# EAGLE board IOBoard (EAGLE 9.6.2)
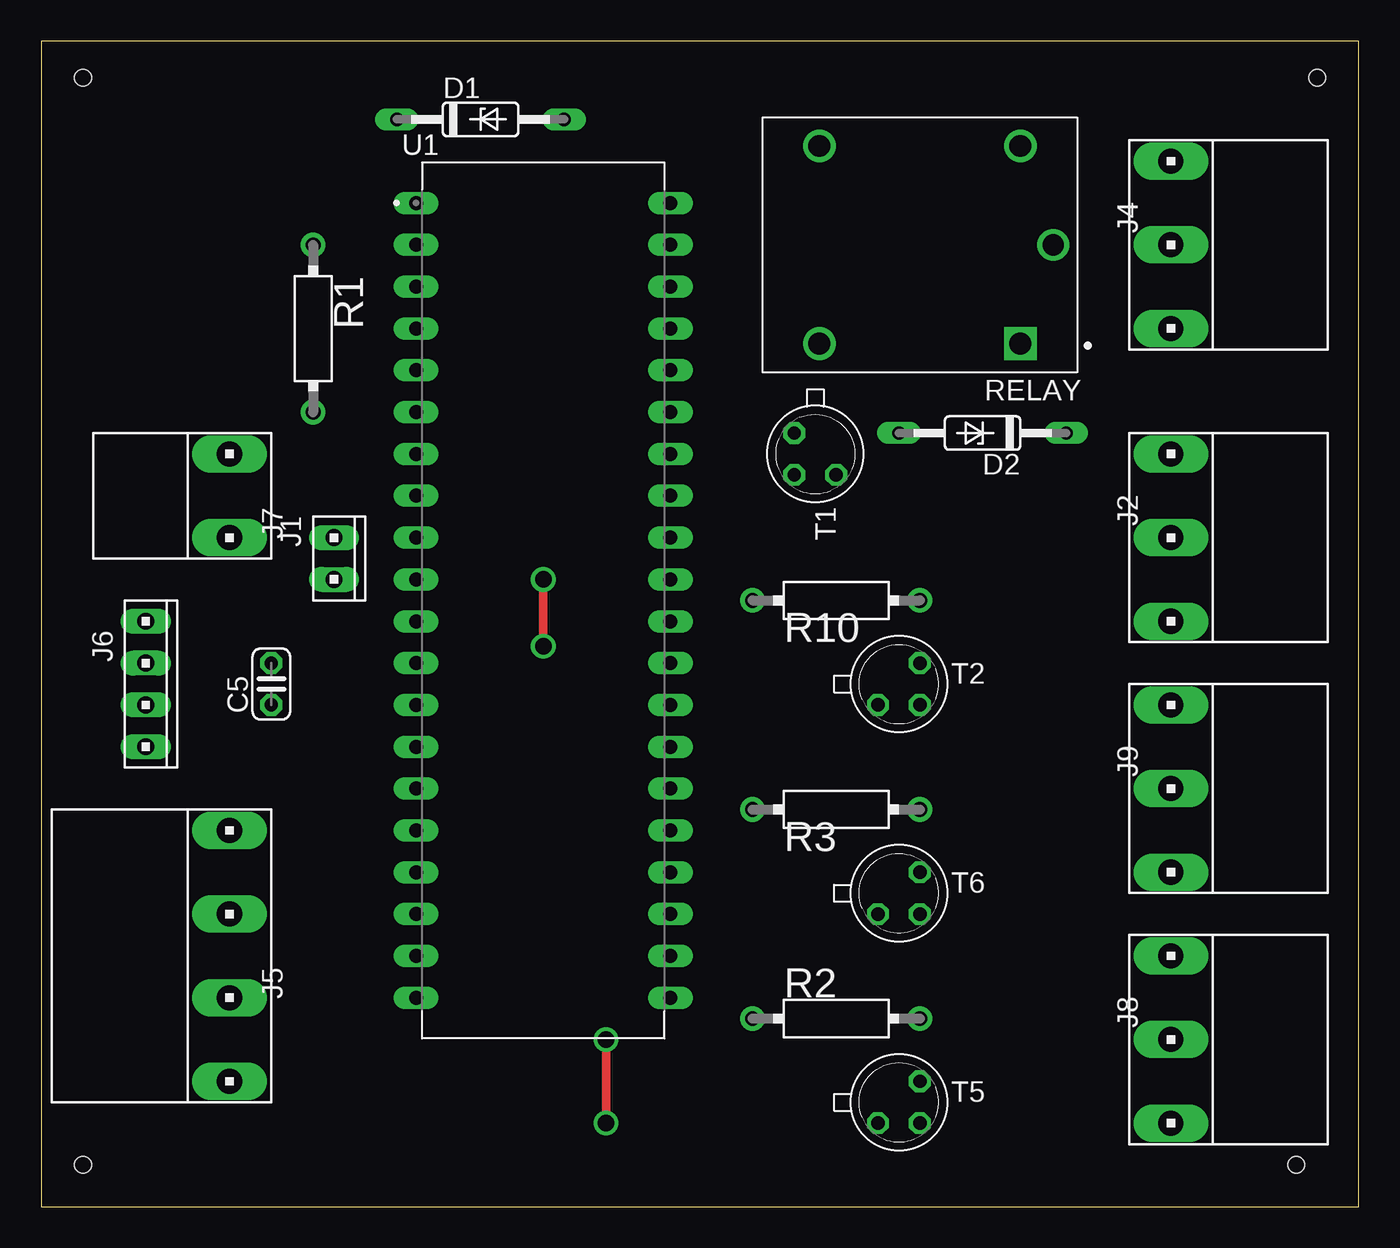
[diagram p0: board, top side]
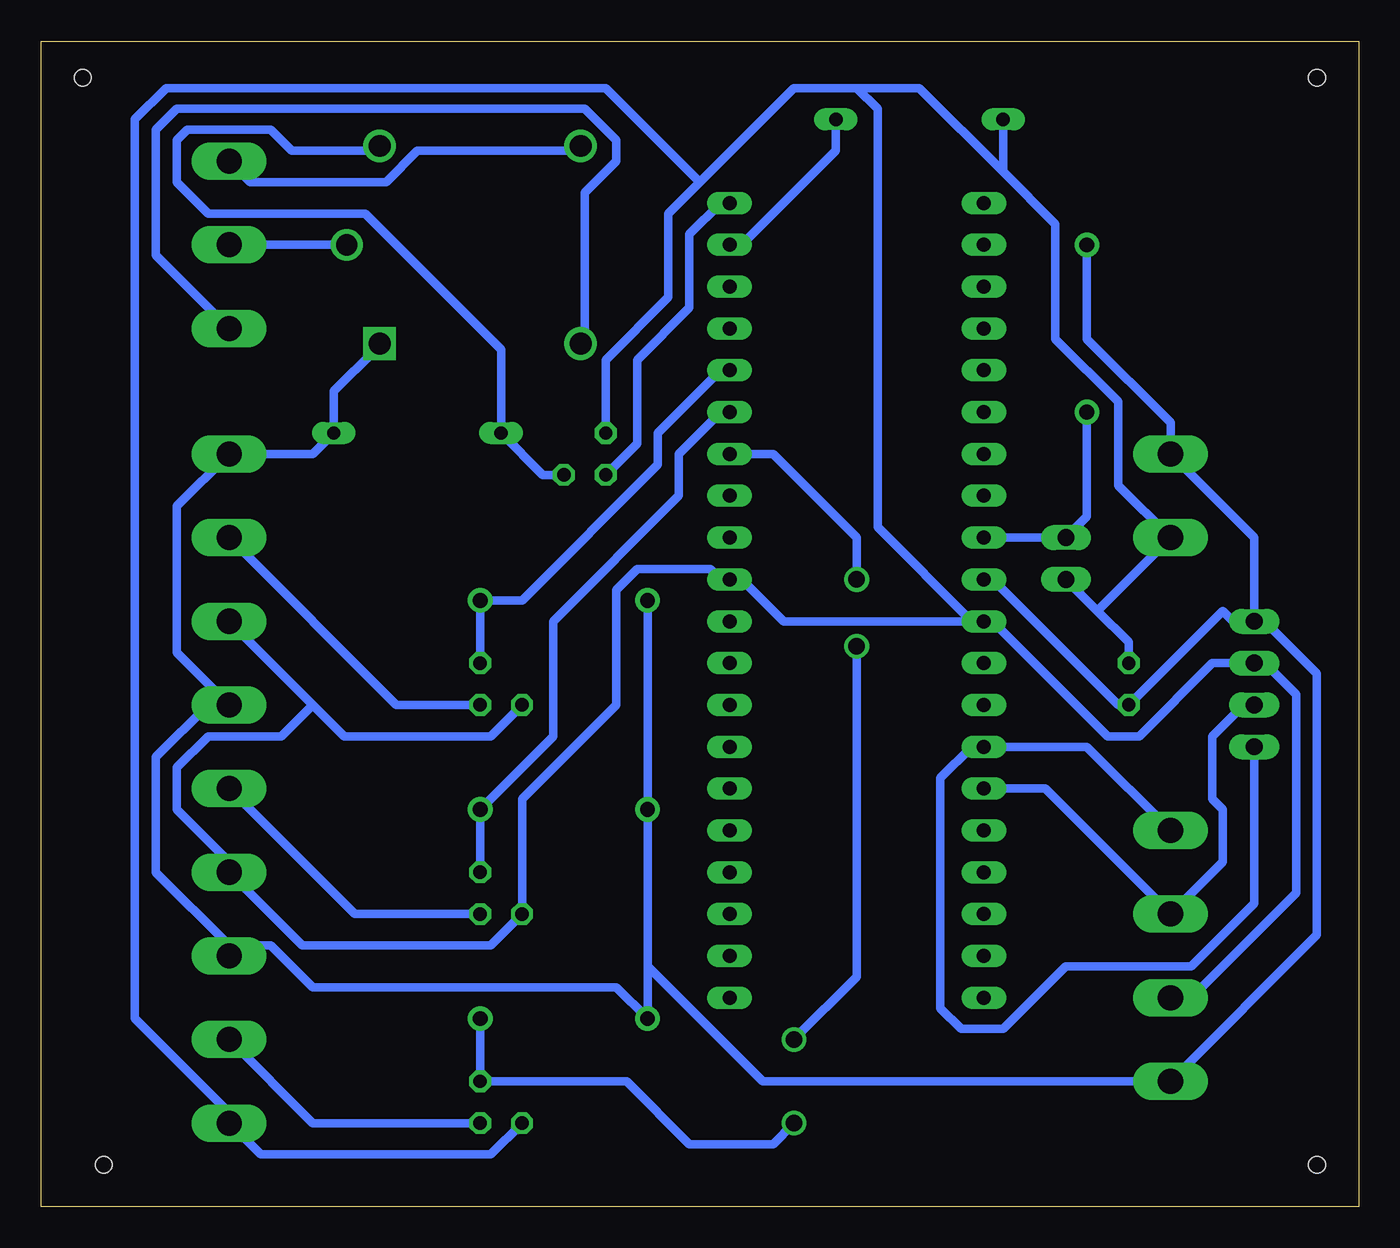
[diagram p1: board, bottom side, seen from below]

Size 79.99 x 70.79 mm. Coordinates in mm from the lower left corner, seen from the top.
Outline: 0,0 79.99,0 79.99,70.79 0,70.79 0,0
Copper layers (1*16): Top 0.035mm / dielectric 1.5mm / Bottom 0.035mm
Design rules "default *": minimum track width 20mil, minimum drill 0.35mm, track to track 20mil, track to pad 20mil, pad to pad 20mil, via to via 20mil, smd to smd 20mil, copper to edge 40mil, drill to drill 6mil, minimum pad ring 10mil, minimum via ring 8mil, stop-mask expansion 4mil, vias tented up to drill 0mil, thermal gap 10mil
Holes 1 mm at 2.54,68.58 77.47,68.58 2.54,2.54 76.2,2.54

## Footprints (pad centres in the part's own frame; a part is rotated, then mirrored left to right if it is on the bottom)
C025-024X044 = drill 0.813 octagon: 1 -1.27,0; 2 1.27,0
DO35Z10 = drill 0.813 long: A 5.08,0; C -5.08,0
10X02MTA = drill 1.016 long: 1 1.27,0; 2 -1.27,0
10X05MTA_MYV = drill 1.524 long: 1 5.08,0; 3 0,0; 5 -5.08,0
10X07MTA_MYV = drill 1.524 long: 1 7.62,0; 3 2.54,0; 5 -2.54,0; 7 -7.62,0
10X04MTA = drill 1.016 long: 1 3.81,0; 2 1.27,0; 3 -1.27,0; 4 -3.81,0
10X03MTA_MYV = drill 1.524 long: 1 2.54,0; 3 -2.54,0
HPS58 = drill 0.9 pad 1.5: 1 -5.08,0; 2 5.08,0
RELAY_SRD-05VDC-SL-C = drill 1.32 square: A1 -6.1,6 | drill 1.32: A2 -6.1,-6; NC 6.1,6; NO 6.1,-6 | drill 1.29: COM -8.1,0
TO18 = drill 0.813 octagon: 1 -1.27,-1.27; 2 1.27,-1.27; 3 1.27,1.27
DIP1540W47P254L5320H635Q40B = drill 0.85 pad 1.28 long: 1 -7.718,24.13; 2 -7.718,21.59; 3 -7.718,19.05; 4 -7.718,16.51; 5 -7.718,13.97; 6 -7.718,11.43; 7 -7.718,8.89; 8 -7.718,6.35; 9 -7.718,3.81; 10 -7.718,1.27; 11 -7.718,-1.27; 12 -7.718,-3.81; 13 -7.718,-6.35; 14 -7.718,-8.89; 15 -7.718,-11.43; 16 -7.718,-13.97; 17 -7.718,-16.51; 18 -7.718,-19.05; 19 -7.718,-21.59; 20 -7.718,-24.13; 21 7.718,-24.13; 22 7.718,-21.59; 23 7.718,-19.05; 24 7.718,-16.51; 25 7.718,-13.97; 26 7.718,-11.43; 27 7.718,-8.89; 28 7.718,-6.35; 29 7.718,-3.81; 30 7.718,-1.27; 31 7.718,1.27; 32 7.718,3.81; 33 7.718,6.35; 34 7.718,8.89; 35 7.718,11.43; 36 7.718,13.97; 37 7.718,16.51; 38 7.718,19.05; 39 7.718,21.59; 40 7.718,24.13

## Placement (x,y rotation side)
C5  [C025-024X044]  13.97,31.75 90 top
D1  1N821  [DO35Z10]  26.67,66.04 0 top
D2  1N821  [DO35Z10]  57.15,46.99 180 top
J1  [10X02MTA]  17.78,39.37 270 top
J2  [10X05MTA_MYV]  68.58,40.64 270 top
J4  [10X05MTA_MYV]  68.58,58.42 270 top
J5  [10X07MTA_MYV]  11.43,15.24 90 top
J6  [10X04MTA]  6.35,31.75 270 top
J7  [10X03MTA_MYV]  11.43,43.18 90 top
J8  [10X05MTA_MYV]  68.58,10.16 270 top
J9  [10X05MTA_MYV]  68.58,25.4 270 top
R1  [HPS58]  16.51,53.34 270 top
R2  [HPS58]  48.26,11.43 0 top
R3  [HPS58]  48.26,24.13 0 top
R10  [HPS58]  48.26,36.83 0 top
RELAY  SRD-05VDC-SL-C  [RELAY_SRD-05VDC-SL-C]  53.34,58.42 180 top
T1  2N2222  [TO18]  46.99,45.72 270 top
T2  2N2222  [TO18]  52.07,31.75 0 top
T5  2N2222  [TO18]  52.07,6.35 0 top
T6  2N2222  [TO18]  52.07,19.05 0 top
U1  ATMEGA32A-PU  [DIP1540W47P254L5320H635Q40B]  30.48,36.83 0 top

## Library data of the parts
C5 = rcl; SPICEPREFIX: C
D1 D2 = diode
J1 J6 = con-amp
J2 J4 J5 J7-J9 = con-amp_edit
R1-R3 R10 = resistor-power; OC_FARNELL: unknown; OC_NEWARK: unknown
RELAY = SRD-05VDC-SL-C; AVAILABILITY: Unavailable; DESCRIPTION: 5V Trigger Relay Module For Arduino And Raspberry Pi 5V Trigger Relay Module For Arduino And Raspberry Pi; MF: Songle Relay; MP: SRD-05VDC-SL-C; PACKAGE: None; PRICE: None
T1 T2 T5 T6 = transistor
U1 = ATMEGA32A-PU; AVAILABILITY: Unavailable; DESCRIPTION: IC MCU 8BIT 32KB FLASH 40DIP; MF: Microchip Technology; MP: ATMEGA32A-PU; PACKAGE: None; PRICE: None

## Nets
AVCC: U1.30
GND: C5.2 D1.C J1.1 J2.1 J5.5 J6.3 J7.3 J8.1 J9.1 T1.1 T2.1 T5.1 T6.1 U1.11 U1.31
MISO: U1.7
MOSI: U1.6
N$1: J4.5 RELAY.NO
N$2: J4.3 RELAY.COM
N$3: J4.1 RELAY.NC
N$4: D2.A RELAY.A2 T1.3
N$5: J8.3 T5.2
N$6: J2.3 T2.2
N$7: J9.3 T6.2
PA0: T1.2 U1.40
PA1: D1.A U1.39
PA4: R10.2 T2.3 U1.36
PA5: R3.2 T6.3 U1.35
PA6: R2.2 T5.3 U1.34
PA7: U1.33
RST: J1.2 R1.2 U1.9
RX: J5.3 J6.2 U1.15
SCK: U1.8
TX: J5.1 J6.1 U1.14
VCC: C5.1 D2.C J2.5 J5.7 J6.4 J7.1 J8.5 J9.5 R1.1 R2.1 R3.1 R10.1 RELAY.A1 U1.10

## Tracks (layer width: path | path; a pad name or v marks a point on that pad's centre or on a via)
GND
  Bottom 0.508: T2.1 52.7,28.57 61.59,28.57 63.5,30.48 | J2.1 63.5,30.48 | 63.5,30.48 65.41,28.57 69.85,28.57 71.75,26.67 71.75,24.13 68.58,20.95 J9.1 64.14,15.88 52.7,15.88 T6.1 50.8,24.77 45.09,30.48 45.09,37.47 43.81,38.73 39.37,38.73 38.73,38.1 U1.31 37.47,38.1 34.92,35.56 23.5,35.56 | J5.5 10.16,12.7 3.81,19.05 3.81,31.11 5.71,33.02 J6.3 8.89,33.02 13.34,28.57 15.24,28.57 22.23,35.56 U1.11 23.5,35.56 | T5.1 52.7,3.17 66.67,3.17 J8.1 68.58,5.71 74.3,11.43 74.3,66.04 72.39,67.94 45.72,67.94 40.01,62.23 | C5.2 13.97,34.29 15.88,36.2 | J1.1 15.88,36.2 | 21.59,62.87 D1.C | 21.59,62.87 18.41,59.69 18.41,52.7 14.61,48.9 14.61,43.81 J7.3 15.88,36.2 | T1.1 45.72,51.44 41.91,55.24 41.91,60.33 40.01,62.23 | 40.01,62.23 34.29,67.94 30.48,67.94 | 30.48,67.94 26.67,67.94 21.59,62.87 | 23.5,35.56 29.21,41.27 29.21,66.67 30.48,67.94
N$1
  Bottom 0.508: J4.5 67.31,62.23 59.05,62.23 57.15,64.14 47.62,64.14 RELAY.NO
N$2
  Bottom 0.508: J4.3 RELAY.COM
N$3
  Bottom 0.508: J4.1 73.03,57.78 73.03,65.41 71.75,66.67 46.99,66.67 45.09,64.77 45.09,63.5 46.99,61.59 46.99,52.7 RELAY.NC
N$4
  Bottom 0.508: T1.3 49.53,44.45 D2.A 52.07,52.07 60.33,60.33 69.85,60.33 71.75,62.23 71.75,64.77 71.12,65.41 66.04,65.41 64.77,64.14 59.69,64.14 RELAY.A2
N$5
  Bottom 0.508: T5.2 63.5,5.08 J8.3
N$6
  Bottom 0.508: T2.2 58.42,30.48 J2.3
N$7
  Bottom 0.508: T6.2 60.96,17.78 J9.3
PA0
  Bottom 0.508: T1.2 43.81,46.35 43.81,51.44 40.64,54.61 40.64,59.05 38.73,60.96 U1.40
PA1
  Bottom 0.508: D1.A 31.75,64.14 37.47,58.42 U1.39
PA4
  Bottom 0.508: T2.3 R10.2 50.8,36.83 42.55,45.09 42.55,46.99 38.73,50.8 U1.36
PA5
  Bottom 0.508: T6.3 R3.2 48.9,28.57 48.9,35.56 41.27,43.18 41.27,45.72 38.73,48.26 U1.35
PA6  (via drill 1)
  Top 0.508: v34.29,5.08 v34.29,10.16 | v30.48,38.1 v30.48,34.05
  Bottom 0.508: R2.2 T5.3 44.45,7.62 40.64,3.81 35.56,3.81 v34.29,5.08 | v34.29,10.16 30.48,13.97 v30.48,34.05 | v30.48,38.1 30.48,40.64 35.56,45.72 U1.34
RST
  Bottom 0.508: U1.9 J1.2 16.51,41.91 R1.2
RX
  Bottom 0.508: U1.15 19.05,25.4 J5.3 8.26,20.95 8.26,24.13 8.89,24.77 8.89,28.57 6.99,30.48 J6.2
TX
  Bottom 0.508: J5.1 16.51,27.94 U1.14 23.5,27.94 25.4,26.04 25.4,12.06 24.13,10.79 21.59,10.79 17.78,14.61 10.16,14.61 6.35,18.41 J6.1
VCC
  Bottom 0.508: RELAY.A1 59.69,52.07 62.23,49.53 D2.C 63.5,45.72 J2.5 71.75,42.55 71.75,33.66 J9.5 69.85,30.48 73.03,27.3 73.03,20.32 68.58,15.88 | U1.10 22.23,38.1 14.61,30.48 C5.1 8.26,36.2 7.62,35.56 J6.4 6.35,36.2 | R1.1 16.51,52.7 11.43,47.62 J7.1 6.35,40.64 6.35,36.2 | 43.18,14.61 R3.1 R10.1 | 43.18,14.61 R2.1 45.09,13.34 63.5,13.34 66.04,15.88 68.58,15.88 | 43.18,14.61 36.2,7.62 J5.7 2.54,16.51 2.54,32.38 6.35,36.2 | 68.58,15.88 J8.5